# EAGLE board Retro_Lite_CM5_Right_PCB_v1 - RP2040 (EAGLE 9.6.1)
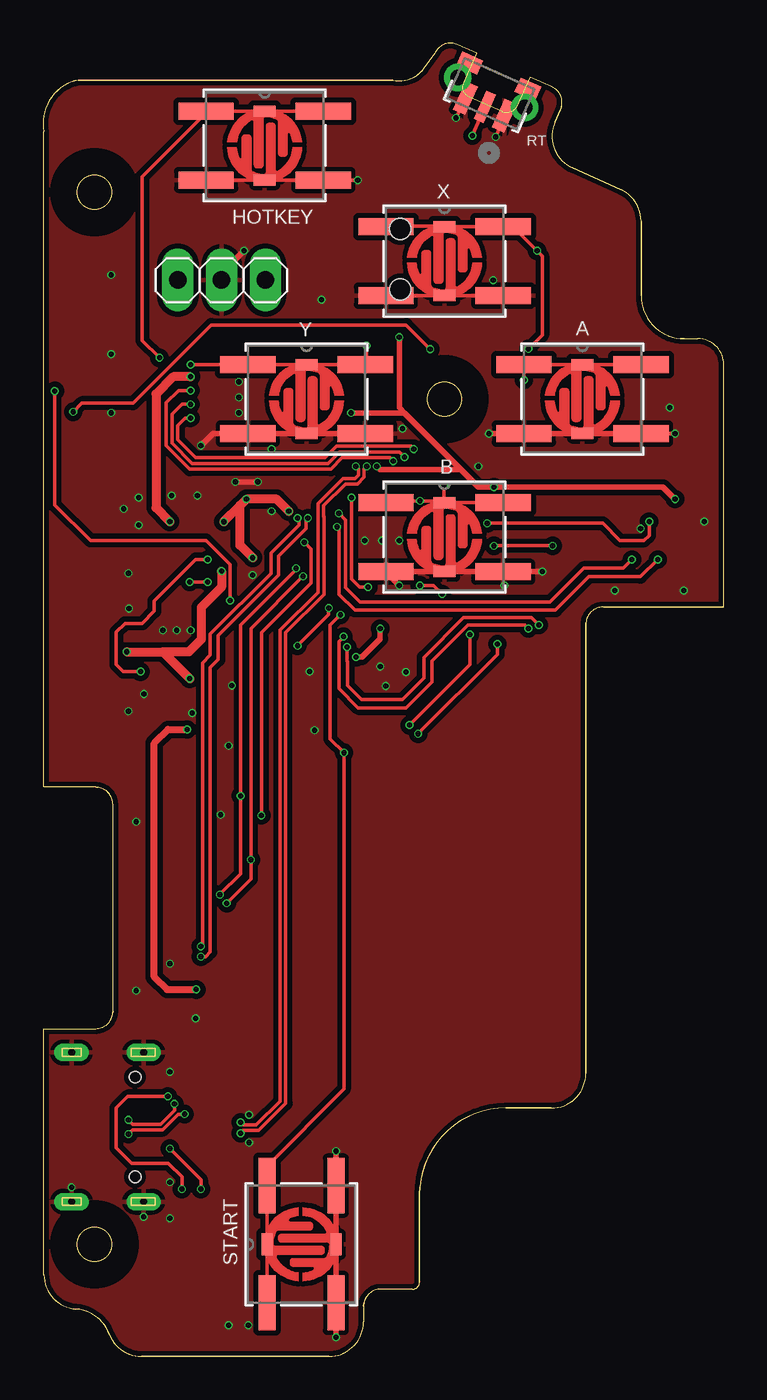
[diagram p0: board, top side]
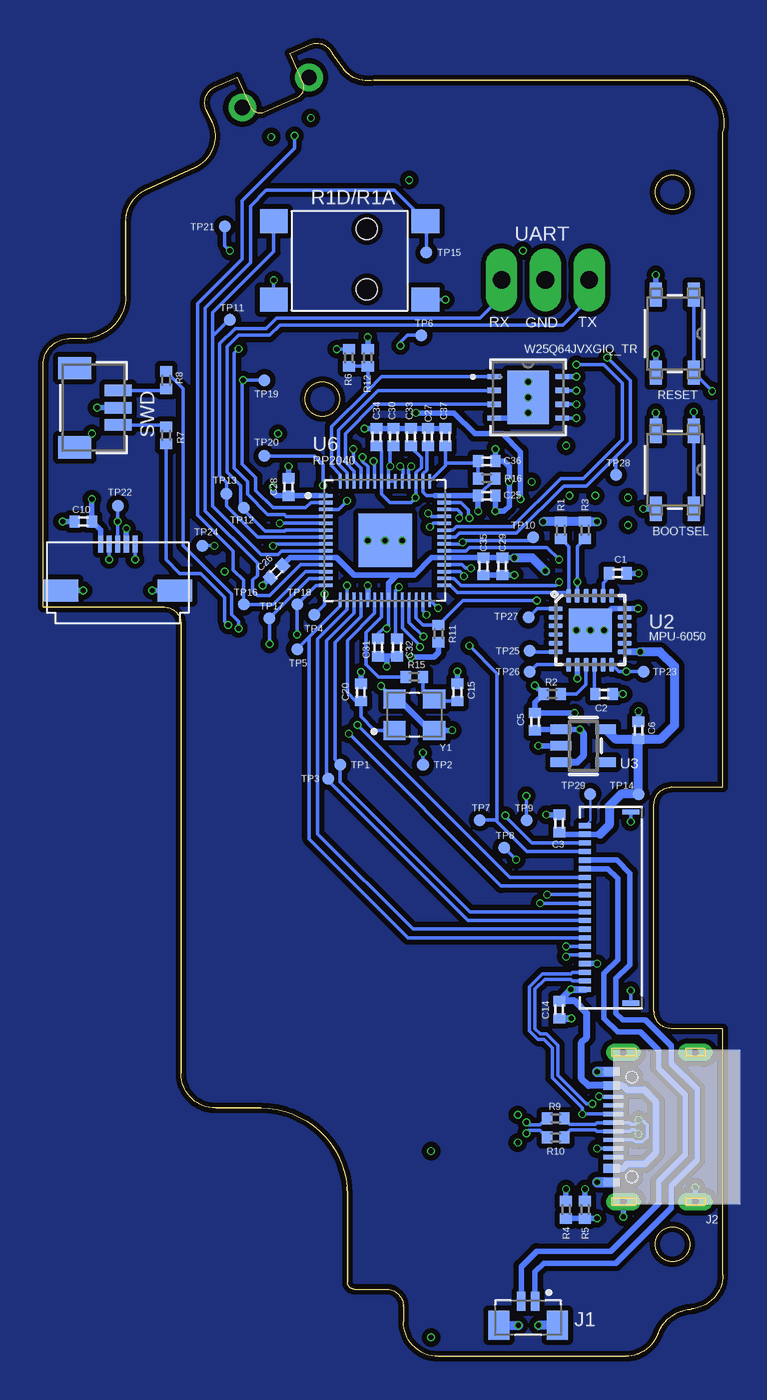
[diagram p1: board, bottom side, seen from below]

Size 39.48 x 76.14 mm. Coordinates in mm from the lower left corner, seen from the top.
Outline: 3.05,33 0.05,33 0.05,71
Outline: 2.05,74 20.27,74
Outline: 22.1,74.68 22.71,75.55 arc-90 24.03,76.05 25.17,75.55 24.41,73.85 arc90 24.73,73.01 26.63,72.15 arc90 27.47,72.47 28.23,74.17 29.51,73.6
Outline: 30.01,72.28 29.69,71.55
Outline: 30.7,68.91 33.5,67.66
Outline: 34.68,65.83 34.68,61.5
Outline: 37.18,59 37.98,59
Outline: 39.48,43.45 39.48,57.5
Outline: 39.48,43.45 32.48,43.45
Outline: 31.48,42.45 31.48,16.39
Outline: 29.48,14.39 26.83,14.39
Outline: 21.83,9.39 21.83,4.29
Outline: 21.43,3.89 19.58,3.89
Outline: 18.58,2.89 18.58,2
Outline: 16.58,0 5.71,0 arc-69 3.83,1.29
Outline: 3.05,19 0.05,19 0.05,4.74
Outline: 4.05,20 4.05,32
Outline: 4.05,32 arc90 3.05,33
Outline: 2.05,74 arc90 0.05,71
Outline: 20.27,74 arc66 22.1,74.68
Outline: 30.01,72.28 arc90 29.51,73.6
Outline: 29.69,71.55 arc90 30.7,68.91
Outline: 34.68,65.83 arc66 33.5,67.66
Outline: 34.68,61.5 arc90 37.18,59
Outline: 39.48,57.5 arc90 37.98,59
Outline: 32.48,43.45 arc90 31.48,42.45
Outline: 29.48,14.39 arc90 31.48,16.39
Outline: 26.83,14.39 arc90 21.83,9.39
Outline: 21.43,3.89 arc90 21.83,4.29
Outline: 19.58,3.89 arc90 18.58,2.89
Outline: 16.58,0 arc90 18.58,2
Outline: 3.83,1.29 arc65 1.9,2.74
Outline: 0.05,4.74 arc86 1.9,2.74
Outline: 3.05,19 arc90 4.05,20
Outline: 29.51,73.6 arc-85 30.05,72.36 30.01,72.28
Outline: 29.69,71.55 30.01,72.28
Outline: 29.69,71.55 arc85 30.54,68.99 30.7,68.91
Outline: 33.5,67.66 30.7,68.91
Outline: 33.5,67.66 33.52,67.64 arc-60 34.67,66 34.68,65.83
Outline: 34.68,61.5 34.68,65.83
Outline: 34.68,61.5 arc85 36.96,59.01 37.18,59
Outline: 37.98,59 arc-85 39.47,57.63 39.48,57.5
Outline: 39.48,43.45 39.48,57.5
Outline: 32.48,43.45 39.48,43.45
Outline: 32.48,43.45 arc85 31.48,42.53 31.48,42.45
Outline: 31.48,16.39 31.48,42.45
Outline: 31.48,16.39 arc-85 29.65,14.4 29.48,14.39
Outline: 26.83,14.39 29.48,14.39
Outline: 26.83,14.39 arc85 21.85,9.83 21.83,9.39
Outline: 21.83,4.29 21.83,9.39
Outline: 21.83,4.29 arc-85 21.46,3.9 21.43,3.89
Outline: 19.58,3.89 arc85 18.58,2.98 18.58,2.89
Outline: 18.58,2 arc-85 16.75,0.01 16.58,0
Outline: 16.58,0 5.71,0 5.55,0.01 arc-65 3.83,1.29
Outline: 3.83,1.29 3.76,1.47 3.66,1.65 arc55 1.9,2.74
Outline: 1.9,2.74 1.88,2.75 1.7,2.77 1.53,2.81 arc-75 0.05,4.74
Outline: 3.05,19 arc85 4.05,19.91 4.05,20
Outline: 4.05,32 arc85 3.14,33 3.05,33
Outline: 0.05,71 arc-85 1.83,73.95 2.05,74
Outline: 20.27,74 2.05,74
Outline: 20.27,74 20.3,73.99 arc60 22,74.56 22.1,74.68
Outline: circle at 2.98,6.5 radius 1
Outline: circle at 23.28,55.5 radius 1
Outline: circle at 2.98,67.5 radius 1
Copper layers (1*16): Top 0.035mm / dielectric 1.6mm / Bottom 0.035mm
Design rules "jlcpcb-2layers *": minimum track width 5mil, minimum drill 0.3mm, track to track 5mil, track to pad 5mil, pad to pad 5mil, via to via 5mil, smd to smd 5mil, copper to edge 0.2mm, drill to drill 6mil, minimum pad ring 10mil, minimum via ring 3mil, stop-mask expansion 0mil, vias tented up to drill 100mil, thermal gap 10mil
Net classes: 1 USB2.0: width 0.192 mm, clearance 0.114 mm; 2 USBEXT: width 0.254 mm
tKeepout: 9 lines
bKeepout: 8 lines
tRestrict: area 21.7,53.9 to 24.9,57.1; area 1.4,65.9 to 4.6,69.1; area 1.4,4.9 to 4.6,8.1

## Footprints (pad centres in the part's own frame; a part is rotated, then mirrored left to right if it is on the bottom)
EVQQ2_3 = smd 3.2 x 0.991: 1 -3.4,2; 2 -3.4,-2; 3 3.4,-2; 4 3.4,2
MEMBRANEBUTTON = smd 0.635 x 1.27: P$1 2,0; P$2 -2,0
C0402 = smd 0.6 x 0.7: 1 -0.5,0; 2 0.5,0
JST_BM02B-SURS-TF(LF)(SN) = smd 0.5 x 1.1: 1 -0.4,0; 2 0.4,0 | smd 1.2 x 1.7: S1 -1.7,1.4; S2 1.7,1.4
U262-161N-4BVC11 = smd 0.5 x 0.95: A1B12 -3.2,7.455; A4B9 -2.4,7.455; B1A12 3.2,7.455; B4A9 2.4,7.455 | smd 0.25 x 1.15: A5 -1.25,7.355; A6 -0.25,7.355; A7 0.25,7.355; A8 1.25,7.355; B5 1.75,7.355; B6 0.75,7.355; B7 -0.75,7.355; B8 -1.75,7.355 | drill 0.4 pad 1 long: SHIELD_1 -4.325,6.78; SHIELD_2 -4.325,2.6; SHIELD_3 4.325,6.78; SHIELD_4 4.325,2.6 | hole 0.65: -2.89,6.28; 2.89,6.28
CONN3_3033816_WRE = smd 0.762 x 1.803: 1 0.056,-0.441; 3 2.545,-0.441 | smd 0.61 x 1.803: 2 1.3,-0.441 | smd 1.295 x 0.889: 4 -0.55,-2.395; 5 3.15,-2.395 | drill 0.889 pad 0.889: 6 -0.813,-1.346; 7 3.429,-1.346
CON_5034802000_MOL = smd 0.3 x 0.7: 1 -4.75,1.5; 2 -4.25,1.5; 3 -3.75,1.5; 4 -3.25,1.5; 5 -2.75,1.5; 6 -2.25,1.5; 7 -1.75,1.5; 8 -1.25,1.5; 9 -0.75,1.5; 10 -0.25,1.5; 11 0.25,1.5; 12 0.75,1.5; 13 1.25,1.5; 14 1.75,1.5; 15 2.25,1.5; 16 2.75,1.5; 17 3.25,1.5; 18 3.75,1.5; 19 4.25,1.5; 20 4.75,1.5 | smd 0.3 x 1: P1 -5.54,-1.15; P2 5.54,-1.15
CONN_BM03B-SRSS-TB(LF)(SN)_JST = smd 0.66 x 1.549: 1 1,1.428; 2 0,1.428; 3 -1,1.428 | smd 1.295 x 1.905: 4 -2.3,-1.097; 5 2.3,-1.097
1X03 = drill 1.016 long: 1 -2.54,0; 2 0,0; 3 2.54,0
R0402 = smd 0.6 x 0.7: 1 -0.5,0; 2 0.5,0
SMD_025816_WRE = smd 1.397 x 0.711: 1 -2.261,1.1; 2 2.261,1.1; 3 -2.261,-1.1; 4 2.261,-1.1
TP07R = smd 0.7 x 0.7: TP 0,0
QFN24_4MM_SMSC = smd 0.8 x 0.28: 1 -2,1.25; 2 -2,0.75; 3 -2,0.25; 4 -2,-0.25; 5 -2,-0.75; 6 -2,-1.25; 13 2,-1.25; 14 2,-0.75; 15 2,-0.25; 16 2,0.25; 17 2,0.75; 18 2,1.25 | smd 0.28 x 0.8: 7 -1.25,-2; 8 -0.75,-2; 9 -0.25,-2; 10 0.25,-2; 11 0.75,-2; 12 1.25,-2; 19 1.25,2; 20 0.75,2; 21 0.25,2; 22 -0.25,2; 23 -0.75,2; 24 -1.25,2 | smd 2.5 x 2.5: THERM 0,0
SOT23-5 = smd 0.55 x 1.2: 1 -0.95,-1.3; 2 0,-1.3; 3 0.95,-1.3; 4 0.95,1.3; 5 -0.95,1.3
DFN_XGIQ_TR_WIN = smd 0.762 x 0.305: 1 -1.968,1.2; 2 -1.968,0.4; 3 -1.968,-0.4; 4 -1.968,-1.2; 5 1.968,-1.2; 6 1.968,-0.4; 7 1.968,0.4; 8 1.968,1.2 | smd 2.388 x 3.099: 9 0,0
QFN40P700X700X90-57N = smd 0.84 x 0.2: 1 -3.435,2.6; 2 -3.435,2.2; 3 -3.435,1.8; 4 -3.435,1.4; 5 -3.435,1; 6 -3.435,0.6; 7 -3.435,0.2; 8 -3.435,-0.2; 9 -3.435,-0.6; 10 -3.435,-1; 11 -3.435,-1.4; 12 -3.435,-1.8; 13 -3.435,-2.2; 14 -3.435,-2.6; 29 3.435,-2.6; 30 3.435,-2.2; 31 3.435,-1.8; 32 3.435,-1.4; 33 3.435,-1; 34 3.435,-0.6; 35 3.435,-0.2; 36 3.435,0.2; 37 3.435,0.6; 38 3.435,1; 39 3.435,1.4; 40 3.435,1.8; 41 3.435,2.2; 42 3.435,2.6 | smd 0.2 x 0.84: 15 -2.6,-3.435; 16 -2.2,-3.435; 17 -1.8,-3.435; 18 -1.4,-3.435; 19 -1,-3.435; 20 -0.6,-3.435; 21 -0.2,-3.435; 22 0.2,-3.435; 23 0.6,-3.435; 24 1,-3.435; 25 1.4,-3.435; 26 1.8,-3.435; 27 2.2,-3.435; 28 2.6,-3.435; 43 2.6,3.435; 44 2.2,3.435; 45 1.8,3.435; 46 1.4,3.435; 47 1,3.435; 48 0.6,3.435; 49 0.2,3.435; 50 -0.2,3.435; 51 -0.6,3.435; 52 -1,3.435; 53 -1.4,3.435; 54 -1.8,3.435; 55 -2.2,3.435; 56 -2.6,3.435 | smd 3.1 x 3.1: 57 0,0
SWITCHSTICK_BREAKOUT = smd 0.3 x 1: 1 0,0; 2 0.5,0; 3 1,0; 4 1.5,0; 5 2,0 | smd 2 x 1.3: SHIELD -2.3,-2.7; SHIELD1 4.3,-2.7
TMHF07 = smd 1.6 x 1.4: P$1 -4.4,2.25; P$2 4.4,2.25; P$3 -4.4,-2.3; P$4 4.4,-2.3 | hole 1.2: -1,1.65; -1,-1.85
XTAL_ECS-120-18-33-JGN-TR3 = smd 1.3 x 1.1: 1 -1.15,-0.9; 2 1.15,-0.9; 3 1.15,0.9; 4 -1.15,0.9

## Placement (x,y rotation side)
A  A  [EVQQ2_3]  31.28,55.5 0 top
AA  MEMBRANEBUTTON  [MEMBRANEBUTTON]  31.28,55.5 90 top
B  B  [EVQQ2_3]  23.28,47.5 0 top
BB  MEMBRANEBUTTON  [MEMBRANEBUTTON]  23.28,47.5 90 top
C1  2.2nF  [C0402]  6.15,45.4 0 bottom
C2  0.1uF  [C0402]  6.95,38.4 0 bottom
C3  0.1uF  [C0402]  9.55,30.9 270 bottom
C5  10uF  [C0402]  10.95,36.8 90 bottom
C6  10uF  [C0402]  4.95,36.3 90 bottom
C10  0.1uF  [C0402]  37.15,48.4 180 bottom
C14  0.1uF  [C0402]  9.55,20.1 90 bottom
C15  10pF  [C0402]  15.45,38.5 90 bottom
C20  10pF  [C0402]  21.05,38.5 90 bottom
C25  0.1uF  [C0402]  13.75,49.9 0 bottom
C26  0.1uF  [C0402]  25.95,45.5 225 bottom
C27  0.1uF  [C0402]  17.15,53.3 90 bottom
C28  0.1uF  [C0402]  25.25,50.4 90 bottom
C29  1uF  [C0402]  12.85,45.8 270 bottom
C30  0.1uF  [C0402]  19.15,53.3 90 bottom
C31  0.1uF  [C0402]  20.05,41.1 270 bottom
C32  1uF  [C0402]  18.95,41.1 270 bottom
C33  0.1uF  [C0402]  18.15,53.3 90 bottom
C34  0.1uF  [C0402]  20.15,53.3 90 bottom
C35  0.1uF  [C0402]  13.95,45.8 270 bottom
C36  1uF  [C0402]  13.75,51.9 0 bottom
C37  0.1uF  [C0402]  16.15,53.3 90 bottom
HOTKEY  A  [EVQQ2_3]  12.85,70.2 0 top
J1  BM02B-SURS-TF(LF)(SN)  [JST_BM02B-SURS-TF(LF)(SN)]  11.35,3.2 180 bottom
J2  U262-161N-4BVC11  [U262-161N-4BVC11]  -0.95,13.3 90 bottom
J3  436333033816  [CONN3_3033816_WRE]  26.63,71.51 155.8 top
J4  5034802000  [CON_5034802000_MOL]  6.55,26.02 90 bottom
J5  BM03B-SRSS-TB(LF)(SN)  [CONN_BM03B-SRSS-TB(LF)(SN)_JST]  36.55,55 270 bottom
JP1  [1X03]  10.35,62.4 180 top
R1  10K  [R0402]  9.45,47.9 270 bottom
R2  10K  [R0402]  9.95,38.4 180 bottom
R3  10K  [R0402]  8.05,47.9 270 bottom
R4  5.1k  [R0402]  9.15,8.5 90 bottom
R5  5.1k  [R0402]  8.05,8.5 90 bottom
R6  10k  [R0402]  20.65,57.9 90 bottom
R7  100  [R0402]  32.35,53.4 270 bottom
R8  100  [R0402]  32.35,56.6 90 bottom
R9  27R4  [R0402]  9.75,13.8 180 bottom
R10  27R4  [R0402]  9.75,12.7 180 bottom
R11  10k  [R0402]  16.55,41.9 270 bottom
R12  1K  [R0402]  21.75,57.9 270 bottom
R15  1k  [R0402]  17.95,39.4 0 bottom
R16  27.4  [R0402]  13.75,50.9 0 bottom
S1  434133025816  [SMD_025816_WRE]  2.85,59.3 270 bottom
START  START  [EVQQ2_3]  14.98,6.5 90 top
START1  MEMBRANEBUTTON  [MEMBRANEBUTTON]  14.98,6.5 180 top
T1  MEMBRANEBUTTON  [MEMBRANEBUTTON]  12.85,70.2 90 top
TP1  TPTP07R  [TP07R]  22.25,34.3 0 bottom
TP2  TPTP07R  [TP07R]  17.45,34.3 0 bottom
TP3  TPTP07R  [TP07R]  22.95,33.5 0 bottom
TP4  TPTP07R  [TP07R]  23.75,43 0 bottom
TP5  TPTP07R  [TP07R]  24.75,41 0 bottom
TP6  TPTP07R  [TP07R]  17.55,59.2 0 bottom
TP7  TPTP07R  [TP07R]  14.15,31.1 0 bottom
TP8  TPTP07R  [TP07R]  12.75,29.5 0 bottom
TP9  TPTP07R  [TP07R]  11.45,31.1 0 bottom
TP10  TPTP07R  [TP07R]  11.05,47.5 0 bottom
TP11  TPTP07R  [TP07R]  28.65,60.1 0 bottom
TP12  TPTP07R  [TP07R]  27.85,49.2 180 bottom
TP13  TPTP07R  [TP07R]  28.85,50 0 bottom
TP14  TPTP07R  [TP07R]  4.95,32.6 0 bottom
TP15  TPTP07R  [TP07R]  17.25,64 0 bottom
TP16  TPTP07R  [TP07R]  27.85,43.6 0 bottom
TP17  TPTP07R  [TP07R]  26.35,42.8 0 bottom
TP18  TPTP07R  [TP07R]  24.75,43.6 0 bottom
TP19  TPTP07R  [TP07R]  26.65,56.6 0 bottom
TP20  TPTP07R  [TP07R]  26.65,52.2 0 bottom
TP21  TPTP07R  [TP07R]  28.95,65.5 0 bottom
TP22  TPTP07R  [TP07R]  35.15,49.3 0 bottom
TP23  TPTP07R  [TP07R]  4.65,39.7 0 bottom
TP24  TPTP07R  [TP07R]  30.25,47 0 bottom
TP25  TPTP07R  [TP07R]  11.25,40.9 0 bottom
TP26  TPTP07R  [TP07R]  11.25,39.7 0 bottom
TP27  TPTP07R  [TP07R]  11.33,42.84 0 bottom
TP28  TPTP07R  [TP07R]  6.25,51.1 0 bottom
TP29  TPTP07R  [TP07R]  7.75,32.6 0 bottom
U2  MPU-6050  [QFN24_4MM_SMSC]  7.75,42.1 0 bottom
U3  AP2112K-3.3  [SOT23-5]  8.15,35.4 270 bottom
U5  W25Q64JVXGIQ_TR  [DFN_XGIQ_TR_WIN]  11.35,55.6 0 bottom
U6  RP2040  [QFN40P700X700X90-57N]  19.65,47.3 0 bottom
U9  434133025816  [SMD_025816_WRE]  2.85,51.4 270 bottom
U$1  SWITCHSTICK_BREAKOUT  [SWITCHSTICK_BREAKOUT]  36.15,47.1 0 bottom
U$2  TMHF07  [TMHF07]  21.7,63.51 180 bottom
X  X  [EVQQ2_3]  23.28,63.5 0 top
XX  MEMBRANEBUTTON  [MEMBRANEBUTTON]  23.28,63.5 90 top
Y  Y  [EVQQ2_3]  15.28,55.5 0 top
Y1  ECS-120-18-33-JGN-TR3  [XTAL_ECS-120-18-33-JGN-TR3]  17.95,37.2 0 bottom
YY  MEMBRANEBUTTON  [MEMBRANEBUTTON]  15.28,55.5 90 top

## Library data of the parts
A B HOTKEY START X Y = EVQ-Q2B03W; AVAILABILITY: Unavailable; DESCRIPTION: Tactile Switch SPST-NO Top Actuated Surface Mount; MF: Panasonic Electronic; MP: EVQQ2B03W; PACKAGE: None; PRICE: None
AA BB START1 T1 XX YY = Membrane Button
C1-C3 C5 C6 C10 C14 C15 C20 C25-C37 = rcl
J1 = BM02B-SURS-TF_LF__SN_; CHECK_PRICES: https://www.snapeda.com/parts/BM02B-SURS-TF(LF)(SN)/JST+Sales+America+Inc./view-part/?ref=eda; DESCRIPTION: Connector Header Surface Mount 2 position 0.031 (0.80mm); MF: JST Sales; MP: BM02B-SURS-TF(LF)(SN); PACKAGE: None; SNAPEDA_LINK: https://www.snapeda.com/parts/BM02B-SURS-TF(LF)(SN)/JST+Sales+America+Inc./view-part/?ref=snap
J2 = gustl_U262-161N-4BVC11
J3 = 5034801700; COPYRIGHT: Copyright (C) 2023 Ultra Librarian. All rights reserved.; MANUFACTURER_PART_NUMBER: 436333033816; MFR_NAME: Wurth Electronics
J4 = 5034801700; COPYRIGHT: Copyright (C) 2023 Ultra Librarian. All rights reserved.; MANUFACTURER_PART_NUMBER: 5034802000; MFR_NAME: Molex Connector Corporation
J5 = 1-826632-5; COPYRIGHT: Copyright (C) 2023 Ultra Librarian. All rights reserved.; MANUFACTURER_PART_NUMBER: BM03B-SRSS-TB(LF)(SN); MFR_NAME: JST
JP1 = pinhead
R1-R12 R15 R16 = rcl; SPICEPREFIX: R
S1 U9 = TACT; COPYRIGHT: Copyright (C) 2022 Ultra Librarian. All rights reserved.; DIGI-KEY_PART_NUMBER_1: 732-13663-2-ND; DIGI-KEY_PART_NUMBER_2: 732-13663-1-ND; DIGI-KEY_PART_NUMBER_3: 732-13663-6-ND; MANUFACTURER_PART_NUMBER: 434133025816; MFR_NAME: Wurth Electronics
TP1-TP29 = testpad
U2 U3 = microbuilder
U5 = W25Q64JVXGIQ; COPYRIGHT: Copyright (C) 2022 Ultra Librarian. All rights reserved.; DIGI-KEY_PART_NUMBER_1: 256-W25Q64JVXGIQTR-ND; MANUFACTURER_PART_NUMBER: W25Q64JVXGIQ TR; MFR_NAME: Winbond
U6 = RP2040; AVAILABILITY: In Stock; DESCRIPTION: RP2040 chip for Raspberry Pi Pico - ARM® Cortex®-M0+ MCU 32-Bit; MF: Raspberry Pi; MP: RP2040; PACKAGE: None; PRICE: None; PURCHASE-URL: https://pricing.snapeda.com/search/part/RP2040/?ref=eda
U$1 = My_Stuff
U$2 = tmhf07
Y1 = ECS-120-18-33-JGN-TR3; MF: ECS Inc.; MP: ECS-120-18-33-JGN-TR3; PACKAGE: None; PURCHASE-URL: https://pricing.snapeda.com/search/part/ECS-120-18-33-JGN-TR3/?ref=eda

## Nets
3V3: C3.2 C6.1 C10.1 C25.1 C26.1 C27.1 C28.1 C29.1 C30.1 C31.1 C35.1 J4.19 R1.1 R3.1 R6.2 R11.2 R16.2 TP14.TP U2.8 U2.13 U3.5 U5.8 U6.1 U6.10 U6.22 U6.33 U6.42 U6.44 U6.48 U6.49 U$1.1
AD0: R2.1 U2.9
CC1: J2.A5 R4.2
CC2: J2.B5 R5.2
CLKIN: TP27.TP U2.1
CPOUT: C1.1 U2.20
FSYNC_IN: U2.11
GND: A.2 A.3 AA.P$2 B.2 B.3 BB.P$2 C1.2 C2.2 C3.1 C5.2 C6.2 C10.2 C14.1 C15.2 C20.2 C25.2 C26.2 C27.2 C28.2 C29.2 C30.2 C31.2 C32.2 C33.2 C34.2 C35.2 C36.2 C37.2 HOTKEY.2 HOTKEY.3 J1.S1 J1.S2 J2.A1B12 J2.B1A12 J2.SHIELD_1 J2.SHIELD_2 J2.SHIELD_3 J2.SHIELD_4 J3.1 J3.3 J4.4 J4.P1 J4.P2 J5.2 JP1.2 R2.2 R4.1 R5.1 S1.3 S1.4 START1.P$2 START.2 START.3 T1.P$2 U2.18 U2.THERM U3.2 U5.4 U5.9 U6.19 U6.57 U9.3 U9.4 U$1.4 U$1.SHIELD U$1.SHIELD1 U$2.P$1 U$2.P$2 X.2 X.3 XX.P$2 Y1.2 Y1.4 Y.2 Y.3 YY.P$2
GPIO0/A: A.1 A.4 AA.P$1 TP19.TP U6.2
GPIO1/B: B.1 B.4 BB.P$1 TP20.TP U6.3
GPIO2/X: TP21.TP U6.4 X.1 X.4 XX.P$1
GPIO3/R3: TP22.TP U6.5 U$1.3
GPIO4/UART_TX: JP1.3 TP12.TP U6.6
GPIO5/UART_RX: JP1.1 TP13.TP U6.7
GPIO6/SPARE: TP24.TP U6.8
GPIO7/ZR_FULL: TP11.TP U6.9 U$2.P$4
GPIO8/ZR_HALF: TP15.TP U6.11 U$2.P$3
GPIO9/RT: J3.2 TP16.TP U6.12
GPIO10/LT: J4.13 TP17.TP U6.13
GPIO11/SELECT: J4.14 TP18.TP U6.14
GPIO12/DPAD_UP: J4.7 TP5.TP U6.15
GPIO13/DPAD_DOWN: J4.8 TP4.TP U6.16
GPIO14/DPAD_LEFT: J4.9 TP3.TP U6.17
GPIO15/DPAD_RIGHT: J4.10 TP1.TP U6.18
GPIO16/HOTKEY2: J4.17 TP7.TP U6.28
GPIO17/START: START1.P$1 START.1 START.4 TP2.TP U6.27
GPIO20/ZL_HALF: J4.11 TP8.TP U6.31
GPIO21/ZL_FULL: J4.12 TP9.TP U6.32
GPIO23/L3: J4.18 TP10.TP U6.35
GPIO24/HOTKEY1: HOTKEY.1 HOTKEY.4 T1.P$1 TP28.TP U6.36
GPIO25/Y: TP6.TP U6.37 Y.1 Y.4 YY.P$1
GPIO26/ADC0: U6.38 U$1.2
GPIO27/ADC1: U6.39 U$1.5
GPIO28/ADC2: J4.5 U6.40
GPIO29/ADC3: J4.6 U6.41
I2C1_SCL_RP2040: R3.2 U2.23 U6.30
I2C1_SDA_RP2040: R1.2 U2.24 U6.29
INT_MPU6050: TP23.TP U2.12 U6.34
N$1: C15.1 R15.2 Y1.3
N$2: J5.1 R7.1
N$3: J4.20 TP29.TP
N$4: J5.3 R8.1
N$5: C32.1 C33.1 C34.1 U6.23 U6.45 U6.50
N$5_N: R9.2 U6.46
N$5_P: R10.2 U6.47
N$15: R12.1 U9.1 U9.2
N$17: C36.1 C37.1 R16.1 U6.43
QSPI_CS: R6.1 R12.2 U5.1 U6.56
QSPI_SCLK: U5.6 U6.52
QSPI_SD0: U5.5 U6.53
QSPI_SD1: U5.2 U6.55
QSPI_SD2: U5.3 U6.54
QSPI_SD3: U5.7 U6.51
REGOUT: C2.1 U2.10
RUN: R11.1 S1.1 S1.2 U6.26
SCL_EXT: TP26.TP U2.7
SDA_EXT: TP25.TP U2.6
SPK_RN: J1.1 J4.16
SPK_RP: J1.2 J4.15
SWCLK: R7.2 U6.24
SWD: R8.2 U6.25
USB_N [USB2.0]: J2.A7 J2.B7 J4.2 R9.1
USB_P [USB2.0]: J2.A6 J2.B6 J4.3 R10.1
VCC: C5.1 C14.2 J2.A4B9 J2.B4A9 J4.1 U3.1 U3.3
XTAL_IN: C20.1 U6.20 Y1.1
XTAL_OUT: R15.1 U6.21

## Tracks (layer width: path | path; a pad name or v marks a point on that pad's centre or on a via)
3V3  (via drill 0.3)
  Top 0.305: 24.25,51.4 25.25,50.4 v26.15,50.4 35.95,50.4 v36.65,49.7 | 24.25,51.4 22.65,53 | 22.65,53 22.33,53.32 | v20.65,59.1 v20.66,59.09 20.66,55.01 20.96,54.7 | 22.65,53 22.65,53.01 20.96,54.7 | v19.35,51.6 v19.35,51.59 19.54,51.4 24.25,51.4 | 20.96,54.7 v17.85,54.7 | v18.15,40.54 18.49,40.54 19.55,41.6 v19.55,42.2
  Top 0.508: v4.85,40.85 6.95,40.85 | 6.95,40.85 v8.5,39.3 | 6.95,40.85 8.45,40.85 9.17,41.58 9.17,43.42 10.35,44.6 v10.35,45.53 | v14.25,49 13.55,49.7 v11.79,49.7 11.42,49.33 | 11.42,49.33 v10.48,48.39 | v8.55,56.8 7.55,56.8 6.55,55.8 6.55,49.2 v7.35,48.4 | v12.15,46.3 11.42,47.03 11.42,49.33
  Bottom 0.203: U6.48 U6.49 19.45,51.5 v19.35,51.6 19.35,52.6 C30.1 | C27.1 17.22,52.73 17.22,51.4 17.45,51.17 U6.44 17.45,50.1 17.25,49.9 16.75,49.9 16.05,49.9 | C25.1 R16.2 | U6.22 19.45,42.3 v19.55,42.2 19.75,42.2 20.05,41.9 C31.1
  Bottom 0.305: U5.8 v8.55,56.8 | U2.8 v8.5,39.3 | v12.15,46.3 C29.1 C35.1 U6.33 16.95,46.3 17.95,45.3 18.95,45.3 | v14.25,49 C25.1 16.05,49.9 U6.42 16.75,49.9 | v26.15,50.4 26.15,50.1 25.95,49.9 C28.1 U6.1 | U6.22 19.45,44.8 18.95,45.3 | 18.95,45.3 21.45,45.3 22.45,46.3 U6.10 25.15,46.3 C26.1 | v10.47,48.4 v10.48,48.39 | U$1.1 36.15,47.9 C10.1 v36.65,49.7 | C3.2 9.42,30.27 J4.19 7.18,30.27 | R6.2 v20.65,59.1 | v17.85,54.7 15.65,54.7 14.45,53.5 12.85,53.5 11.79,52.44 v11.79,49.7 | R11.2 16.55,40.8 16.81,40.54 v18.15,40.54
  Bottom 0.406: v4.85,40.85 U2.13
  Bottom 0.508: v7.35,48.4 R3.1 R1.1 v10.47,48.4 | U3.5 6.3,35.8 C6.1 | C6.1 3.65,35.8 2.85,36.6 2.85,40 3.7,40.85 v4.85,40.85 | 7.18,30.27 6.65,30.8 6.65,31.9 5.95,32.6 TP14.TP C6.1 | v12.15,46.3 11.12,46.3 v10.35,45.53
AD0
  Bottom 0.203: U2.9 8,38.95 8.55,38.4 R2.1
CC1  (via drill 0.3)
  Top 0.203: v7.35,12.05 9.15,10.25 v9.15,9.7
  Bottom 0.203: J2.A5 v7.35,12.05
  Bottom 0.305: R4.2 v9.15,9.7
CC2  (via drill 0.3)
  Top 0.203: v7.23,15.07 4.92,15.07 4.25,14.4 4.25,12.1 5.15,11.2 7.25,11.2 8.05,10.4 v8.05,9.7
  Bottom 0.203: J2.B5 6.42,15.07 v7.23,15.07
  Bottom 0.305: R5.2 v8.05,9.7
CLKIN
  Bottom 0.203: U2.1 10.82,43.35 TP27.TP
CPOUT
  Bottom 0.203: U2.20 7,44.85 6.65,45.2 C1.1
GND  (via drill 0.3)
  Top 0.203: 18.35,53.5 Y.3 | 31.25,53.5 AA.P$2 | 34.65,53.5 A.3 v36.65,53.5 | X.2 XX.P$2 X.3 | HOTKEY.2 T1.P$2 HOTKEY.3 v18.25,68.2 | 16.98,6.3 START1.P$2 START.3 v16.98,11.9 | 24.34,72.19 J3.3 v23.95,71.8 | J3.1 v26.25,70.7
  Top 0.305: v28.95,45.5 B.3 BB.P$2 B.2 19.88,45.47 v20.65,44.7 | v9.15,52.8 9.85,53.5 Y.2 YY.P$2 18.35,53.5 | v25.85,53.5 A.2 31.25,53.5 | AA.P$2 34.65,53.5 | 18.35,53.5 19.35,53.5 19.45,53.4 18.45,53.4 18.35,53.5 | 16.98,6.3 START.2 v16.98,1.1 | START1.P$2 v16.98,11.9 | v12.45,50.7 v11.15,50.7 | JP1.2 10.35,62.8 v11.66,64.11
  Bottom 0.203: 11.85,54.4 11.05,54.4 10.8,54.65 | 10.8,54.65 10.75,54.7 | U$2.P$1 v16.15,61.26 | U$2.P$2 v26.1,62.4 | J4.P2 v5.4,31 | J4.P1 v5.4,21.2 | U5.9 11.35,55.2 10.8,54.65 | Y1.4 19.17,38.17 v19.87,38.88
  Bottom 0.305: C1.2 v4.95,45.4 | v15.45,39.7 C15.2 | C28.2 v25.25,51.6 | C10.2 v38.35,48.4 | U$1.SHIELD1 v33.15,44.4 | U$1.SHIELD v37.15,44.4 | U5.4 11.85,54.4 | J2.SHIELD_2 v1.65,9.8 | J2.SHIELD_1 v5.83,8.1 | v4.97,43.35 v4.98,43.35 U2.18 6.5,43.35 6.95,42.9 v6.95,42.1 | C2.2 v5.85,38.4 | C6.2 v4.95,37.4 | U$1.4 v34.65,48 | v12.15,45.3 C29.2 C35.2 | J4.4 v7.35,22.77 | U6.19 v20.65,44.7 | 9.15,35.4 U3.2 v10.75,35.4 | v10.95,38.9 R2.2 10.95,37.9 C5.2 v8.65,37.3 | C26.2 v26.75,44.7 | R4.1 R5.1 v7.35,8 | C3.1 v10.29,31.4 | v3.95,54.7 U9.3 | v4.67,49.14 U9.4 | S1.3 v3.95,62.7 | S1.4 v3.95,58.1 | 13.2,49.9 C25.2 v13.25,49 12.75,49 12.45,49.3 v12.45,50.7 12.45,51.6 12.75,51.9 C36.2 v13.25,52.61 | C37.2 C27.2 C33.2 C30.2 C34.2 v20.85,53.8 | J5.2 v36.35,55 | C32.2 19.55,40.6 | 19.55,40.6 C31.2 | 19.55,40.6 v19.55,40 | C20.2 v21.05,39.67 | 19.17,38.17 18.92,38.17 17.05,36.3 Y1.2 v15.75,36.3
  Bottom 0.406: C14.1 v8.85,19.6
  Bottom 0.508: J1.S1 v10.75,1.8 | J1.S2 v11.91,1.8
  Bottom 0.61: J2.A1B12 v7.35,10.1 | J2.B1A12 v7.35,16.5
  other vias: 7.75,42.1 8.55,42.1 11.95,14 11.95,12.4 19.65,47.3 18.65,47.3 20.65,47.3 11.35,55.6 11.35,56.5 11.35,54.7 5.55,49.8 5.55,48.2 8.95,49.9 7.45,49.9
  pour Top (isolate 0.305): 42.95,77.6 42.95,-0.9 -5.95,-0.9 -5.95,77.6
GND1
  pour Bottom (isolate 0.305): 44.75,79.2 44.75,-2.7 -7.55,-2.7 -7.55,79.2
GPIO0/A  (via drill 0.3)
  Top 0.203: v27.88,56.6 A.1 AA.P$1 A.4
  Bottom 0.203: U6.2 23.95,49.5 24.25,49.2 26.15,49.2 27.15,50.2 27.15,50.95 27.94,51.74 27.94,56.54 v27.88,56.6 TP19.TP
GPIO1/B  (via drill 0.3)
  Top 0.203: B.4 27.05,49.5 27.25,49.3 26.88,49.3 B.4 | 21,49.55 21.05,49.6 v21.85,49.6 23.18,49.6 BB.P$1 | 21,49.55 20.95,49.5 | BB.P$1 B.4 | B.1 19.93,49.55 21,49.55 | BB.P$1 23.25,49.53 v23.25,50.5
  Bottom 0.203: U6.3 22.35,49.1 v21.85,49.6 | v23.25,50.5 23.25,51.7 23.75,52.2 TP20.TP
GPIO2/X  (via drill 0.3)
  Top 0.203: XX.P$1 23.65,65.5 23.75,65.6 23.38,65.6 23.31,65.53 | 23.31,65.53 XX.P$1 | X.1 19.91,65.53 23.31,65.53 | XX.P$1 X.4 27.25,65.5 v28.65,64.1 28.95,63.8 28.95,59.21 v28.15,58.41
  Bottom 0.192: v28.65,64.1 28.95,64.4 TP21.TP
  Bottom 0.203: U6.4 25.38,48.7 25.48,48.8 26.45,48.8 27.63,49.98 27.63,50.73 28.39,51.49 28.39,58.17 v28.15,58.41
GPIO3/R3  (via drill 0.3)
  Top 0.203: v25.75,48.3 32.45,48.3 33.45,47.3 34.85,47.3 35.15,47.6 v35.15,48.4
  Bottom 0.203: v25.75,48.3 U6.5 | U$1.3 v35.15,48.4 TP22.TP
GPIO4/UART_TX
  Bottom 0.203: U6.6 25.41,47.9 25.46,47.84 26.59,47.84 27.85,49.1 TP12.TP 28.04,49.39 28.04,50.49 28.82,51.27 28.82,58.53 28.15,59.2 26.35,59.2 25.75,59.8 9.35,59.8 7.81,61.34 JP1.3
GPIO5/UART_RX
  Bottom 0.203: U6.7 27.05,47.5 28.85,49.3 TP13.TP 28.84,50.66 29.24,51.06 29.24,58.71 28.35,59.6 26.55,59.6 25.95,60.2 14.15,60.2 12.89,61.46 JP1.1
GPIO6/SPARE  (via drill 0.3)
  Top 0.203: v26.15,47 v29.55,47
  Bottom 0.203: U6.8 26.05,47.1 v26.15,47 | v29.55,47 TP24.TP
GPIO7/ZR_FULL
  Bottom 0.203: U6.9 25.65,46.7 25.85,46.5 26.85,46.5 29.65,49.3 29.65,59.15 | U$2.P$4 26.1,64.05 29.65,60.5 29.65,59.15 | 29.65,59.15 28.7,60.1 TP11.TP
GPIO8/ZR_HALF
  Bottom 0.203: TP15.TP 17.25,65.76 U$2.P$3 19.09,67.6 26.55,67.6 27.45,66.7 27.45,63.4 30.07,60.78 30.07,49.02 27.05,46 27.05,45.27 27.32,45 27.32,44.37 27.05,44.1 26.35,44.1 24.55,45.9 U6.11
GPIO9/RT  (via drill 0.3)
  Top 0.203: J3.2 25.02,71.06 | 25.02,71.06 v24.9,70.77 | J3.2 25.22,71.51 | 25.22,71.51 25.02,71.06 | 25.22,71.51 J3.2 | J3.2 25.85,73
  Bottom 0.203: U6.12 24.25,45.5 26.15,43.6 TP16.TP 27.85,45 28.45,45.6 28.45,46.7 30.52,48.77 30.52,61.03 27.95,63.6 27.95,67 24.9,70.05 v24.9,70.77
GPIO10/LT  (via drill 0.3)
  Top 0.203: v26.35,41.3 26.35,40.7 v21.75,36.1
  Bottom 0.203: U6.13 24.07,45.1 26.35,42.82 TP17.TP v26.35,41.3 | J4.13 12.92,27.27 v21.75,36.1
GPIO11/SELECT  (via drill 0.3)
  Top 0.203: v21.25,36.6 24.75,40.1 v24.75,41.84
  Bottom 0.203: U6.14 23.65,44.7 TP18.TP v24.75,41.84 | J4.14 12.42,27.77 v21.25,36.6
GPIO12/DPAD_UP
  Bottom 0.203: U6.15 22.25,43.5 24.05,41.7 | J4.7 18.32,24.27 24.05,30 24.05,41.7 | 24.05,41.7 TP5.TP
GPIO13/DPAD_DOWN  (via drill 0.3)
  Top 0.203: v21.85,44.7 22.65,44.7 v23.15,44.2
  Bottom 0.203: J4.8 18.02,24.77 23.55,30.3 23.55,32.8 23.55,33.3 23.55,41.6 21.85,43.3 U6.16 v21.85,44.7 | TP4.TP 23.15,43.6 v23.15,44.2
GPIO14/DPAD_LEFT
  Bottom 0.203: J4.9 14.84,25.27 22.95,33.38 TP3.TP | U6.17 21.45,43.1 23.05,41.5 23.05,33.78 | 23.05,33.78 22.77,33.5 TP3.TP | TP3.TP 23.05,33.6 23.05,33.78
GPIO15/DPAD_RIGHT
  Bottom 0.203: U6.18 21.05,42.9 22.55,41.4 22.55,34.6 TP1.TP 22.25,33.3 14.72,25.77 J4.10
GPIO16/HOTKEY2  (via drill 0.3)
  Top 0.203: v16.57,43.38 16.57,43.02 v14.75,41.2
  Bottom 0.203: J4.17 11.42,29.27 13.15,31 | 13.15,31 13.15,39.6 v14.75,41.2 | U6.28 v16.57,43.38 | TP7.TP 13.25,31.1 13.15,31
GPIO17/START  (via drill 0.3)
  Top 0.203: 13.15,2.6 12.98,2.77 START.1 START1.P$1 START.4 12.98,11.03 17.45,15.5 v17.45,35 16.65,35.8 16.65,42.4 v17.25,43
  Bottom 0.203: U6.27 17.45,43.2 v17.25,43 | TP2.TP v17.45,35
GPIO20/ZL_HALF  (via drill 0.3)
  Top 0.203: v10.65,26.27 12.05,27.67 v12.05,28.8 12.05,42.2 v15.07,45.23
  Bottom 0.203: 15.52,45.5 U6.31 15.3,45.5 v15.07,45.23 | J4.11 v10.65,26.27 | TP8.TP v12.05,28.8
GPIO21/ZL_FULL  (via drill 0.3)
  Top 0.203: v10.25,26.77 11.45,27.97 v11.45,32.5 11.45,42.4 14.67,45.62 v14.67,45.69
  Bottom 0.203: U6.32 15.18,45.9 14.97,45.69 v14.67,45.69 | J4.12 v10.25,26.77 | TP9.TP v11.45,32.5
GPIO23/L3  (via drill 0.3)
  Top 0.203: v15.15,47.2 15.55,46.8 15.55,44.85 12.66,41.96 v12.66,31.36
  Bottom 0.203: J4.18 11.12,29.77 12.66,31.31 v12.66,31.36 | U6.35 15.25,47.1 v15.15,47.2 15.05,47.3 11.25,47.3 TP10.TP
GPIO24/HOTKEY1  (via drill 0.3)
  Top 0.192: 8.55,72.2 HOTKEY.1
  Top 0.203: v6.75,57.9 5.75,58.9 5.75,68.4 9.45,72.1 HOTKEY.1 T1.P$1 16.65,72.2 16.75,72.1 16.85,72.1 16.75,72.2 HOTKEY.4
  Bottom 0.192: U6.36 15.56,47.5 15.33,47.73 12.02,47.73 9.29,50.46 7.96,50.46 6.08,52.34 5.42,53 5.42,56.57 v6.75,57.9
  Bottom 0.203: 6.22,51.13 TP28.TP 6.25,52.17 6.08,52.34
GPIO25/Y  (via drill 0.3)
  Top 0.203: v8.55,57.5 Y.1 YY.P$1 Y.4 | Y.4 18.75,57.57 v18.75,58.6 | Y.4 19.55,57.5
  Bottom 0.203: U6.37 15.71,47.9 15.51,48.1 12.25,48.1 9.45,50.9 8.15,50.9 5.89,53.16 5.89,56.42 6.97,57.5 v8.55,57.5 | v18.75,58.6 18.75,58.8 18.35,59.2 TP6.TP
GPIO26/ADC0  (via drill 0.3)
  Top 0.203: v17.05,48.1 17.17,47.98 17.17,44.18 18.08,43.27 29.72,43.27 31.65,45.2 34.65,45.2 v35.65,46.2
  Bottom 0.203: v17.05,48.1 16.85,48.3 U6.38 | U$1.2 v35.65,46.2
GPIO27/ADC1  (via drill 0.3)
  Top 0.203: v17.15,48.88 17.54,48.49 17.54,44.58 18.39,43.73 29.38,43.73 31.35,45.7 33.65,45.7 v34.15,46.2
  Bottom 0.203: U6.39 16.97,48.7 v17.15,48.88 | U$1.5 v34.15,46.2
GPIO28/ADC2  (via drill 0.3)
  Top 0.203: v15.35,48.6 15.25,48.5 15.25,48 13.65,46.4 13.65,45.3 10.15,41.8 10.15,40.4 9.7,39.95 9.7,23.45 9.42,23.17 v9.15,23.17
  Bottom 0.203: U6.40 15.45,49.1 15.25,48.9 15.25,48.7 v15.35,48.6 | J4.5 9.05,23.27 v9.15,23.17
GPIO29/ADC3  (via drill 0.3)
  Top 0.203: v9.15,23.77 9.25,23.87 9.25,40.2 9.7,40.65 9.7,41.88 13.22,45.4 13.22,46.57 14.85,48.2 14.85,48.5 v14.75,48.6
  Bottom 0.203: U6.41 15.25,49.5 14.82,49.07 14.82,48.67 v14.75,48.6 | J4.6 v9.15,23.77
I2C1_SCL_RP2040  (via drill 0.3)
  Top 0.203: v9.55,44.9 v8.5,44.9
  Bottom 0.203: R3.2 8.5,46.95 v8.5,44.9 U2.23 | U6.30 15.65,45.1 15.25,44.7 9.75,44.7 v9.55,44.9
I2C1_SDA_RP2040
  Bottom 0.203: R1.2 9,46.95 U2.24 9.2,44.3 15.45,44.3 15.85,44.7 U6.29
INT_MPU6050  (via drill 0.3)
  Top 0.203: v9.55,46.2 8.85,46.2 6.45,43.8 6.45,43.2 5.75,42.5 4.75,42.5 4.25,42 4.25,40.1 TP23.TP v5.65,39.7
  Bottom 0.203: TP23.TP v5.65,39.7 6.1,39.7 U2.12 | U6.34 14.95,46.7 14.75,46.9 10.25,46.9 v9.55,46.2
N$1
  Bottom 0.203: C15.1 16.7,38 Y1.3 17.05,38.1 17.45,38.5 R15.2
N$2
  Bottom 0.203: R7.1 32.45,54 J5.1
N$3
  Bottom 0.152: TP29.TP 7.75,31.07 J4.20
N$4
  Bottom 0.203: R8.1 32.45,56 J5.3
N$5  (via drill 0.3)
  Top 0.203: v18.85,44.6 18.35,44.6 17.88,45.07 v17.88,49.8
  Bottom 0.203: v18.85,44.6 19.05,44.4 U6.23 19.05,41.7 C32.1 | C34.1 19.85,52.5 U6.50 19.85,50 19.35,49.5 18.15,49.5 17.85,49.8 17.85,49.83 | C33.1 18.15,52.7 17.55,52.1 17.55,51.53 17.85,51.23 U6.45 17.85,49.83 | v17.88,49.8 17.85,49.83
N$5_N  (via drill 0.3)
  Top 0.192: v11.45,13.57 11.61,13.41 12.36,13.41 13.75,14.8 13.75,42.1 15.95,44.3 15.95,48.8 15.96,48.81 15.96,49.46 17.4,50.9 18.09,50.9 18.29,51.1 18.29,51.44 v18.13,51.6
  Bottom 0.192: R9.2 10.28,13.8 10.67,13.41 11.29,13.41 v11.45,13.57 | U6.46 18.25,51.14 18.29,51.18 18.29,51.4 18.13,51.56 v18.13,51.6
N$5_P  (via drill 0.3)
  Top 0.192: v11.45,12.93 11.61,13.09 12.49,13.09 14.07,14.67 14.07,41.97 16.28,44.18 16.28,48.68 16.27,48.69 16.27,49.32 17.53,50.58 18.22,50.58 18.61,50.97 18.61,51.44 v18.77,51.6
  Bottom 0.192: R10.2 10.28,12.7 10.67,13.09 11.29,13.09 v11.45,12.93 | U6.47 18.65,51.14 18.61,51.18 18.61,51.4 18.77,51.56 v18.77,51.6
N$15  (via drill 0.3)
  Top 0.203: v22.45,58.4 21.05,59.8 9.75,59.8 5.21,55.26 2.25,55.26 v1.75,54.76
  Bottom 0.203: R12.1 v22.45,58.4 | v1.75,54.76 U9.1 U9.2
N$17
  Bottom 0.192: 16.15,51.8 16.15,51.9 C37.1
  Bottom 0.203: C36.1 14.45,51.9 14.35,51.8 | 14.35,51.8 16.15,51.8 | 16.15,51.9 16.15,51.63 U6.43 | R16.1 14.25,51.7 14.35,51.8
QSPI_CS
  Bottom 0.203: U6.56 22.25,51.13 22.75,51.63 22.75,53.9 20.65,56 | U5.1 19.85,56.8 20.65,56 | R12.2 R6.1 20.65,56
QSPI_SCLK  (via drill 0.3)
  Top 0.203: v8.55,55.2 8.05,55.2 7.48,54.63 7.48,52.94 8.65,51.77 16.52,51.77 17.18,52.43 20.66,52.43 v20.95,52.14
  Bottom 0.203: U5.6 v8.55,55.2 | U6.52 20.65,51.59 20.95,51.89 v20.95,52.14
QSPI_SD0  (via drill 0.3)
  Top 0.203: v8.55,54.4 8.25,54.4 7.81,53.96 7.81,53.14 8.85,52.1 16.35,52.1 17.03,52.78 21.32,52.78 v21.49,52.61
  Bottom 0.203: U5.5 v8.55,54.4 | v21.49,52.61 21.49,51.94 21.05,51.5 U6.53
QSPI_SD1
  Bottom 0.203: U5.2 20.05,56 22.35,53.7 22.35,51.73 21.85,51.23 U6.55
QSPI_SD2
  Bottom 0.203: U5.3 20.25,55.2 21.95,53.5 21.95,51.84 21.45,51.34 U6.54
QSPI_SD3  (via drill 0.3)
  Top 0.203: v8.55,56 7.85,56 7.15,55.3 7.15,52.8 8.51,51.44 16.69,51.44 17.35,52.1 20.12,52.1 v20.31,51.91
  Bottom 0.203: U5.7 v8.55,56 | v20.31,51.91 20.25,51.85 U6.51
REGOUT
  Bottom 0.203: C2.1 7.5,38.45 U2.10
RUN  (via drill 0.3)
  Top 0.203: v10.85,43.82 10.85,45.9 9.45,47.3 2.75,47.3 0.68,49.37 v0.68,55.97
  Bottom 0.203: S1.1 S1.2 v0.68,55.97 0.65,55.94 | U6.26 17.85,42.8 17.45,42.4 R11.1 15.13,43.82 v10.85,43.82
SCL_EXT
  Bottom 0.203: U2.7 10.85,40.1 TP26.TP
SDA_EXT
  Bottom 0.203: U2.6 11.2,40.85 TP25.TP
SPK_RN
  Bottom 0.305: J1.1 10.95,4.9 10.45,5.4 6.25,5.4 3.05,8.6 3.05,9.9 1.55,11.4 1.55,15.5 3.05,17 3.05,18 4.55,19.5 5.85,19.5 6.25,19.9 6.25,21.9 5.45,22.7 5.45,28 6.22,28.77 J4.16
SPK_RP
  Bottom 0.305: J1.2 11.75,5.2 10.85,6.1 6.55,6.1 3.78,8.87 3.78,10.17 2.25,11.7 2.25,15.17 3.78,16.7 3.78,17.73 4.85,18.8 6.15,18.8 6.95,19.6 6.95,22.2 6.15,23 6.15,27.7 6.72,28.27 J4.15
SWCLK  (via drill 0.3)
  Top 0.203: v17.63,41.12 17.63,40.32 17.65,40.3 17.65,38.9 18.46,38.09 20.84,38.09 22.08,39.33 22.08,40.53 24.39,42.84 28.31,42.84 v28.75,42.4
  Bottom 0.203: U6.24 18.65,42.24 17.63,41.22 v17.63,41.12 | v28.75,42.4 28.95,42.6 28.95,44 30.35,45.4 31.55,45.4 32.35,46.2 R7.2
SWD  (via drill 0.3)
  Top 0.203: v17.42,41.73 17.15,41.46 17.15,38.72 18.27,37.6 21.04,37.6 22.55,39.11 22.55,40.32 24.63,42.4 27.95,42.4 v28.15,42.2
  Bottom 0.203: U6.25 18.25,42.56 v17.42,41.73 | v28.15,42.2 28.15,42.6 28.55,43 28.55,44.2 31.35,47 31.35,56.1 R8.2
USB_N  (via drill 0.3)
  Top 0.192: v4.95,13.72 5.21,13.46 6.81,13.46 7.62,14.27 v7.62,14.63
  Bottom 0.192: R9.1 8.92,13.46 8.45,13.46 | 8.45,13.46 7.45,13.46 7.36,13.55 J2.A7 5.45,13.55 5.36,13.46 5.15,13.46 4.95,13.66 v4.95,13.72 | 8.45,13.46 | v7.62,14.63 7.98,14.63 9.63,16.28 9.63,18.03 10.3,18.7 10.65,18.7 10.95,19 10.95,21.3 10.39,21.86 8.87,21.86 8.78,21.77 J4.2
  Bottom 0.203: v4.95,13.72 4.75,13.72 4.45,13.42 4.45,12.74 4.76,12.43 5.14,12.43 5.26,12.55 J2.B7
USB_P  (via drill 0.3)
  Top 0.192: v4.95,12.88 5.21,13.14 6.94,13.14 7.84,14.04 v8.21,14.04
  Bottom 0.192: R10.1 9.25,12.8 8.91,13.14 8.43,13.14 | 8.43,13.14 | 8.43,13.14 7.45,13.14 7.36,13.05 J2.A6 5.45,13.05 5.36,13.14 5.15,13.14 4.95,12.94 v4.95,12.88 | v8.21,14.04 8.21,14.41 9.95,16.15 9.95,17.9 10.43,18.38 10.78,18.38 11.27,18.87 11.27,21.43 10.52,22.18 8.87,22.18 8.78,22.27 J4.3
  Bottom 0.203: J2.B6 v8.2,14.05 v8.21,14.04
VCC  (via drill 0.3)
  Top 0.406: v8.88,21.27 7.18,21.27 6.45,22 6.45,35.55 7.25,36.35 v8.35,36.35
  Bottom 0.305: U3.3 9,34.45 | U3.1 9,36.35 | U3.1 10.9,36.35 C5.1 | U3.1 v8.35,36.35
  Bottom 0.406: J2.A4B9 5.87,10.9 5.63,11.14 4.61,11.14 3.95,11.8 3.95,14.8 4.61,15.46 5.63,15.46 5.87,15.7 J2.B4A9 7.85,15.7 8.25,16.1 8.25,18.2 7.95,18.5 7.95,19.9 8.65,20.6 C14.2 v8.88,21.27 J4.1 | U3.3 8.5,34.45 8.15,34.8 8.15,36.15 v8.35,36.35
XTAL_IN
  Bottom 0.203: Y1.1 20.25,36.3 21.05,37.1 C20.1 21.35,38 21.84,38.49 21.84,41.5 20.25,43.09 U6.20 20.25,43.37
XTAL_OUT
  Bottom 0.203: U6.21 19.85,42.87 20.75,41.97 20.75,40.13 20.02,39.4 R15.1

## Text on the board
tPlace: RT
bPlace: R1D/R1A
bNames: UART | TX | GND | RX | SWD | RESET | RP2040 | BOOTSEL | MPU-6050